# EAGLE board SoilMoisture (EAGLE 7.1.0)
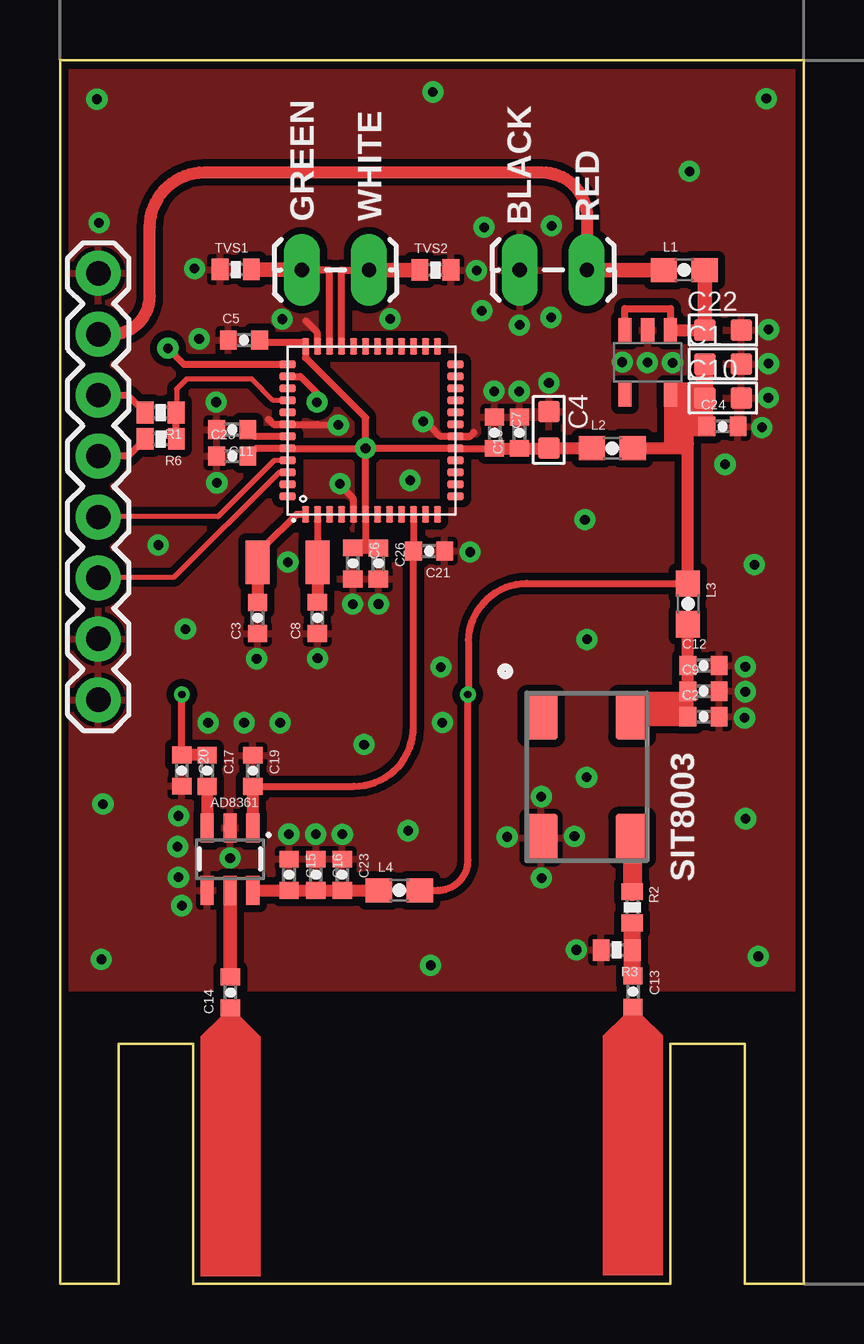
[diagram p0: board, top side]
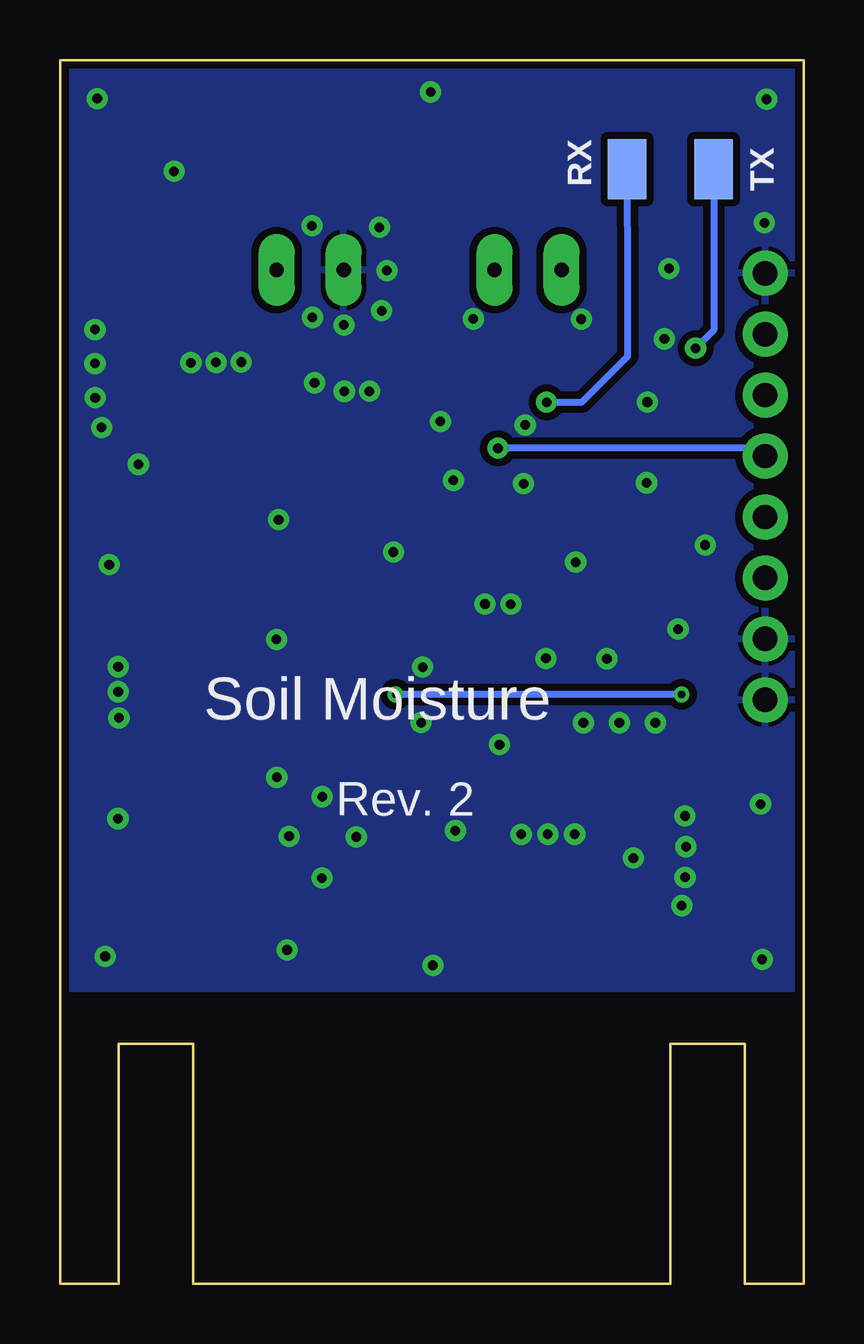
[diagram p1: board, bottom side, seen from below]

Size 31 x 51 mm. Coordinates in mm from the lower left corner, seen from the top.
Outline: 5.55,0 25.45,0 25.45,10 28.55,10 28.55,0 31,0 31,51 0,51 0,0 2.45,0 2.45,10 5.55,10 5.55,0
Copper layers (1*16): Top 0.018mm / dielectric 1.55mm / Bottom 0.018mm
Design rules "eC_2Layer_PClass6_BaseCopperO18_eCDefault *": minimum track width 0.15mm, minimum drill 0.3mm, track to track 0.15mm, track to pad 0.15mm, pad to pad 0.15mm, via to via 0.15mm, smd to smd 0mil, copper to edge 0.25mm, drill to drill 0.35mm, minimum pad ring 0.175mm, minimum via ring 0.125mm, stop-mask expansion 0mil, vias tented up to drill 0.45mm, thermal gap 0.2mm

## Footprints (pad centres in the part's own frame; a part is rotated, then mirrored left to right if it is on the bottom)
SOT23-6 = smd 0.55 x 1.2: 1 0.95,1.3; 2 0,1.3; 3 -0.95,1.3; 4 -0.95,-1.3; 5 0,-1.3; 6 0.95,-1.3
C0603 = smd 0.889 x 0.889: 1 -0.762,0; 2 0.762,0
0402-CAP = smd 0.7 x 0.8: 1 -0.65,0; 2 0.65,0
1X08_ROUND = drill 1.016 pad 1.88: 1 0,0; 2 2.54,0; 3 5.08,0; 4 7.62,0; 5 10.16,0; 6 12.7,0; 7 15.24,0; 8 17.78,0
0603 = smd 1.1 x 1: 1 -0.85,0; 2 0.85,0
QFN48 = smd 0.3 x 0.7: 1 -2.75,-3.5; 2 -2.25,-3.5; 3 -1.75,-3.5; 4 -1.25,-3.5; 5 -0.75,-3.5; 6 -0.25,-3.5; 7 0.25,-3.5; 8 0.75,-3.5; 9 1.25,-3.5; 10 1.75,-3.5; 11 2.25,-3.5; 12 2.75,-3.5; 25 2.75,3.5; 26 2.25,3.5; 27 1.75,3.5; 28 1.25,3.5; 29 0.75,3.5; 30 0.25,3.5; 31 -0.25,3.5; 32 -0.75,3.5; 33 -1.25,3.5; 34 -1.75,3.5; 35 -2.25,3.5; 36 -2.75,3.5 | smd 0.7 x 0.3: 13 3.5,-2.75; 14 3.5,-2.25; 15 3.5,-1.75; 16 3.5,-1.25; 17 3.5,-0.75; 18 3.5,-0.25; 19 3.5,0.25; 20 3.5,0.75; 21 3.5,1.25; 22 3.5,1.75; 23 3.5,2.25; 24 3.5,2.75; 37 -3.5,2.75; 38 -3.5,2.25; 39 -3.5,1.75; 40 -3.5,1.25; 41 -3.5,0.75; 42 -3.5,0.25; 43 -3.5,-0.25; 44 -3.5,-0.75; 45 -3.5,-1.25; 46 -3.5,-1.75; 47 -3.5,-2.25; 48 -3.5,-2.75
1X02_LOCK_LONGPADS = drill 0.6 pad 1.5 long: 1 -0.127,0; 2 2.667,0
0402-RES = smd 0.7 x 0.9: 1 -0.65,0; 2 0.65,0
TLV71333PDBVR = smd 0.55 x 1: P$1 -0.95,-1.35; P$2 0,-1.35; P$3 0.95,-1.35; P$4 0.95,1.35; P$5 -0.95,1.35
TP20SQ = smd 1.6 x 2.5: TP 0,0
SIT8003 = smd 2 x 1.4: P$1 -2.54,-1.9; P$2 2.54,-1.9; P$3 2.54,1.9; P$4 -2.54,1.9
ABS07 = smd 1 x 1.8: P$1 1.25,0; P$2 -1.25,0

## Placement (x,y rotation side)
AD8361  AD8361  [SOT23-6]  7.09,17.69 0 top
C1  10uF  [C0603]  27.64,38.33 0 top
C2  680pF  [0402-CAP]  26.83,23.63 0 top
C3  12.5pF  [0402-CAP]  8.24,27.74 90 top
C4  10uF  [C0603]  20.38,35.58 270 top
C5  100nF  [0402-CAP]  7.67,39.32 0 top
C6  100nF  [0402-CAP]  12.21,30.02 270 top
C7  100nF  [0402-CAP]  18.12,35.46 270 top
C8  12.5pF  [0402-CAP]  10.73,27.75 90 top
C9  100nF  [0402-CAP]  26.83,24.69 0 top
C10  10uF  [C0603]  27.64,36.91 0 top
C11  1uF  [0402-CAP]  7.18,35.59 180 top
C12  1uF  [0402-CAP]  26.83,25.76 0 top
C13  680pF  [0402-CAP]  23.89,12.17 270 top
C14  680pF  [0402-CAP]  7.11,12.13 90 top
C15  680pF  [0402-CAP]  9.56,17.04 270 top
C16  100nF  [0402-CAP]  10.67,17.04 270 top
C17  100nF  [0402-CAP]  6.14,21.37 270 top
C18  680pF  [0402-CAP]  19.16,35.46 90 top
C19  100nF  [0402-CAP]  8.04,21.37 270 top
C20  100nF  [0402-CAP]  5.08,21.38 270 top
C21  680pF  [0402-CAP]  15.39,30.53 180 top
C22  10uF  [C0603]  27.64,39.75 0 top
C23  1uF  [0402-CAP]  11.77,17.04 270 top
C24  680pF  [0402-CAP]  27.62,35.73 0 top
C25  100nF  [0402-CAP]  7.18,34.48 0 top
C26  680pF  [0402-CAP]  13.27,30.01 270 top
JP1  [1X08_ROUND]  1.6,24.33 90 top
L1  470nH  [0603]  26.03,42.24 0 top
L2  470nH  [0603]  23.03,34.81 0 top
L3  470nH  [0603]  26.18,28.33 270 top
L4  470nH  [0603]  14.15,16.39 0 top
MCU  ATSAMD21G18-MU  [QFN48]  12.99,35.56 0 top
PWR  [1X02_LOCK_LONGPADS]  19.3,42.25 0 top
R1  330R  [0402-RES]  4.2,36.3 180 top
R2  1K  [0402-RES]  23.86,15.68 270 top
R3  1K  [0402-RES]  23.21,13.9 180 top
R6  10K  [0402-RES]  4.2,35.2 180 top
REGULATOR  TLV71333PDBVR  [TLV71333PDBVR]  24.5,38.4 180 top
RX  TPSQTP20SQ  [TP20SQ]  7.35,46.45 0 bottom
SIT8003  SIT8003  [SIT8003]  21.96,21.12 270 top
TVS1  TVS  [0402-RES]  7.33,42.27 0 top
TVS2  TVS  [0402-RES]  15.65,42.24 0 top
TX  TPSQTP20SQ  [TP20SQ]  3.75,46.45 0 bottom
USB  [1X02_LOCK_LONGPADS]  10.22,42.25 0 top
X1  ABS07  [ABS07]  9.49,30.07 0 top

## Library data of the parts
AD8361 REGULATOR X1 = m2m4all
C1 C4 C10 C22 MCU = gknff
C2 C3 C5-C9 C11-C21 C23-C26 L1-L4 R1-R3 R6 TVS1 TVS2 = SparkFun-Passives
JP1 = SparkFun-Connectors; PROD_ID: CONN-08437
PWR USB = SparkFun-Connectors
RX TX = testpad
SIT8003 = nickleijenhorst

## Nets
3.3V: C1.1 C10.1 C17.1 C20.1 C24.1 L2.2 L3.1 L4.2 REGULATOR.P$5
EXT_RST: JP1.6 R1.2
GND: AD8361.2 AD8361.4 C1.2 C2.2 C3.1 C4.1 C5.1 C6.2 C7.1 C8.1 C9.2 C10.2 C11.2 C12.2 C15.1 C16.1 C18.2 C19.1 C20.2 C21.1 C22.2 C23.1 C24.2 C25.1 C26.2 JP1.1 JP1.2 JP1.8 MCU.5 MCU.18 MCU.35 MCU.42 PWR.1 R3.2 REGULATOR.P$2 SIT8003.P$2 TVS1.1 TVS2.2
MCUVCC: C4.2 C5.2 C6.1 C7.2 C18.1 C25.2 C26.1 JP1.5 L2.1 MCU.6 MCU.17 MCU.36 MCU.44 R6.2
N$1: C2.1 C9.1 C12.1 L3.2 SIT8003.P$4
N$2: MCU.40 R1.1 R6.1
N$3: C3.2 MCU.1 X1.P$2
N$4: C11.1 MCU.43
N$5: C8.2 MCU.2 X1.P$1
N$6: R2.1 SIT8003.P$3
N$7: C13.1 R2.2 R3.1
N$8: C13.2
N$9: C14.1
N$10: AD8361.5 C14.2
N$11: AD8361.3 C17.2
N$12: AD8361.6 C15.2 C16.2 C23.2 L4.1
RMS_OUT: AD8361.1 C19.2 C21.2 MCU.10
RXD0: MCU.38 RX.TP
SWCLK: JP1.4 MCU.45
SWDIO: JP1.3 MCU.46
TXD0: MCU.37 TX.TP
USBN: MCU.33 TVS2.1 USB.2
USBP: MCU.34 TVS1.2 USB.1
USBPWR: C22.1 L1.2 REGULATOR.P$1 REGULATOR.P$3
VIN: JP1.7 L1.1 PWR.2

## Tracks (layer width: path | path; a pad name or v marks a point on that pad's centre or on a via)
3.3V  (via drill 0.3)
  Top 0.3: L3.1 arc90 L3.1 19.46,29.18 arc90 17.04,26.76 17.04,24.59 arc-90 v17,24.56 | 17.04,24.52 arc90 v17,24.56 | C20.1 v5.08,24.55 arc-90 v5.09,24.56 | L4.2 15.74,16.39 arc90 17.01,17.66 17.01,24.55 arc90 v17,24.56
  Top 0.5: REGULATOR.P$5 26.88,37.05 C10.1 | C10.1 C1.1 | C10.1 26.97,36.91 C24.1 | L3.1 26.18,35 | 26.18,35 26.18,36.21 C10.1 | L2.2 25.99,34.81 26.18,35 | C17.1 C20.1
  Top 0.6: C20.1 arc-90 C20.1
  Bottom 0.3: v5.09,24.56 v17,24.56
EXT_RST
  Top 0.3: JP1.6 2.82,37.03 R1.2
GND  (via drill 0.4)
  Top 0.3: MCU.5 12.24,32.71 11.75,33.2 11.48,33.2 v11.67,33.34 | MCU.35 10.74,39.63 10.24,40.13 | 11.4,35.58 arc90 v11.61,35.79 10.76,35.81 8.91,35.81 8.69,36.03 8.68,36.03 8.9,35.81 MCU.42 | MCU.18 17.09,35.31 17.25,35.47 17.25,35.46 17.1,35.31 15.85,35.31 15.49,35.67
  other vias: 24.49,38.39 14.6,33.48 15.14,35.93 6.51,36.74 5.8,39.38 25.54,38.38 21.96,21.1 9.5,30.07 8.2,26.04 10.74,26.06 21.45,18.64 18.64,18.61 20.08,16.9 20.07,20.29 28.54,23.58 28.57,24.67 28.57,25.71 21.53,13.91 7.09,17.74 4.94,16.93 5.08,15.75 4.94,19.49 23.44,38.41 4.9,18.21 17.1,30.49 9.26,40.2 13.76,40.21 19.16,39.95 17.37,42.23 20.47,40.27 17.59,40.55 17.68,44.03 20.5,44.09 5.61,42.31 6.54,33.38 6.18,23.37 7.68,23.37 9.18,23.37 9.54,18.73 10.66,18.73 11.77,18.72 12.2,28.32 13.28,28.32 18.1,37.2 19.15,37.19 20.39,37.54 29.54,39.77 29.54,38.35 29.53,36.92 29.27,35.68 1.54,49.37 29.45,49.39 15.55,49.67 26.24,46.36 21.89,31.84 28.95,29.96 21.97,26.85 5.23,27.28 4.1,30.78 1.73,13.51 29.11,13.63 15.45,13.26 14.52,18.87 12.68,22.46 28.58,19.37 1.79,19.99 27.73,34.15 15.88,25.69 15.94,23.38 1.63,44.21
  pour Top (isolate 0.3): -1,52.5 33,52.5 33,12.3 -1,12.3
  pour Bottom (isolate 0.3): -1,52.5 33,52.5 33,12.3 -1,12.3
MCUVCC  (via drill 0.4)
  Top 0.3: C7.2 arc90 18.26,34.81 MCU.17 v12.75,34.81 v12.74,34.82 | v12.74,34.82 MCU.6 12.74,30.69 12.77,30.66 | v12.74,34.82 v12.73,34.81 MCU.44 8.16,34.81 C25.2 | C5.2 arc90 8.4,39.23 10.24,39.23 MCU.36 10.24,38.59 12.74,36.09 v12.74,34.82 | R6.2 2.84,34.49 JP1.5
  Top 0.5: 18.17,34.76 C7.2 | 18.26,34.81 C18.1 C4.2 L2.1 | C26.1 12.77,30.66 C6.1
  Bottom 0.3: JP1.5 1.93,34.82 v12.74,34.82
N$1
  Top 0.5: SIT8003.P$4 23.86,23.63 C2.1 C9.1 C12.1 L3.2
N$2
  Top 0.2: MCU.40 8.89,36.81 8,37.7 5.28,37.7 4.86,37.29 4.86,36.31 R1.1
  Top 0.3: R6.1 R1.1
N$3
  Top 0.3: MCU.1 9.86,32.06 8.49,30.69 8.49,30.32 X1.P$2
  Top 0.5: X1.P$2 C3.2
N$4
  Top 0.3: MCU.43 8.11,35.31 C11.1
N$5
  Top 0.3: MCU.2 X1.P$1
  Top 0.5: X1.P$1 10.73,30.05 C8.2
N$6
  Top 0.8: SIT8003.P$3 R2.1
N$7
  Top 0.5: C13.1 23.86,12.85 R3.1 R2.2
N$10
  Top 0.5: AD8361.5 7.09,12.8 C14.2
N$11
  Top 0.5: C17.2 AD8361.3 arc90 AD8361.3
N$12
  Top 0.5: AD8361.6 C15.2 | C15.2 | C15.2 C16.2 C23.2 L4.1 arc-90 L4.1
RMS_OUT
  Top 0.3: MCU.10 14.74,30.78 C21.2 arc90 C21.2 14.73,23.2 arc-90 12.25,20.72 C19.2
  Top 0.5: C19.2 AD8361.1
RXD0  (via drill 0.4)
  Top 0.3: MCU.38 10.03,37.81 10.71,37.12 v10.71,36.74
  Bottom 0.3: v10.71,36.74 9.25,36.74 7.33,38.65 7.33,41.68 RX.TP
SWCLK
  Top 0.2: MCU.45 8.93,34.31 6.59,31.96 1.61,31.96 JP1.4
SWDIO
  Top 0.2: MCU.46 9.13,33.81 4.75,29.43 1.62,29.43 JP1.3
TXD0  (via drill 0.4)
  Top 0.3: MCU.37 5.17,38.31 v4.5,38.98
  Bottom 0.3: TX.TP 3.75,39.73 v4.5,38.98
USBN
  Top 0.3: MCU.33 11.74,42.25 USB.2
  Top 0.6: TVS2.1 USB.2
USBP
  Top 0.3: MCU.34 11.24,42.25 USB.1
  Top 0.6: TVS1.2 10.07,42.27 USB.1
USBPWR
  Top 0.3: REGULATOR.P$3 23.55,40.64 25.45,40.64 REGULATOR.P$1
  Top 0.5: REGULATOR.P$1 C22.1
  Top 0.6: L1.2 C22.1
VIN
  Top 0.5: JP1.7 2.15,39.57 arc90 3.74,41.16 3.74,44.03 arc-90 6.03,46.32 20.09,46.32 arc-90 21.98,44.43 21.98,41.69 arc90 21.99,41.68 21.99,42.22 arc90 PWR.2
  Top 0.6: L1.1 PWR.2
(copper drawn outside any net)
  shapes: Top area x15

## Text on the board
bPlace: Soil Moisture | Rev. 2
tNames: GREEN | WHITE | BLACK | RED
bNames: TX | RX
tDocu: GND | +5V | RESET | VSENSE | SWCLK | SWDIO | GND | GND